# Altium PCB Leningrad_modify.PcbDoc (part 3 of 4)
Units mil, origin at the board's own origin, x right, y up, seen from the top; angles counter-clockwise.
Board outline 10000 x 7310 mil, 2 copper layers (Top Layer, Bottom Layer); 250 components, 267 nets, 1381 pads, 472 vias.
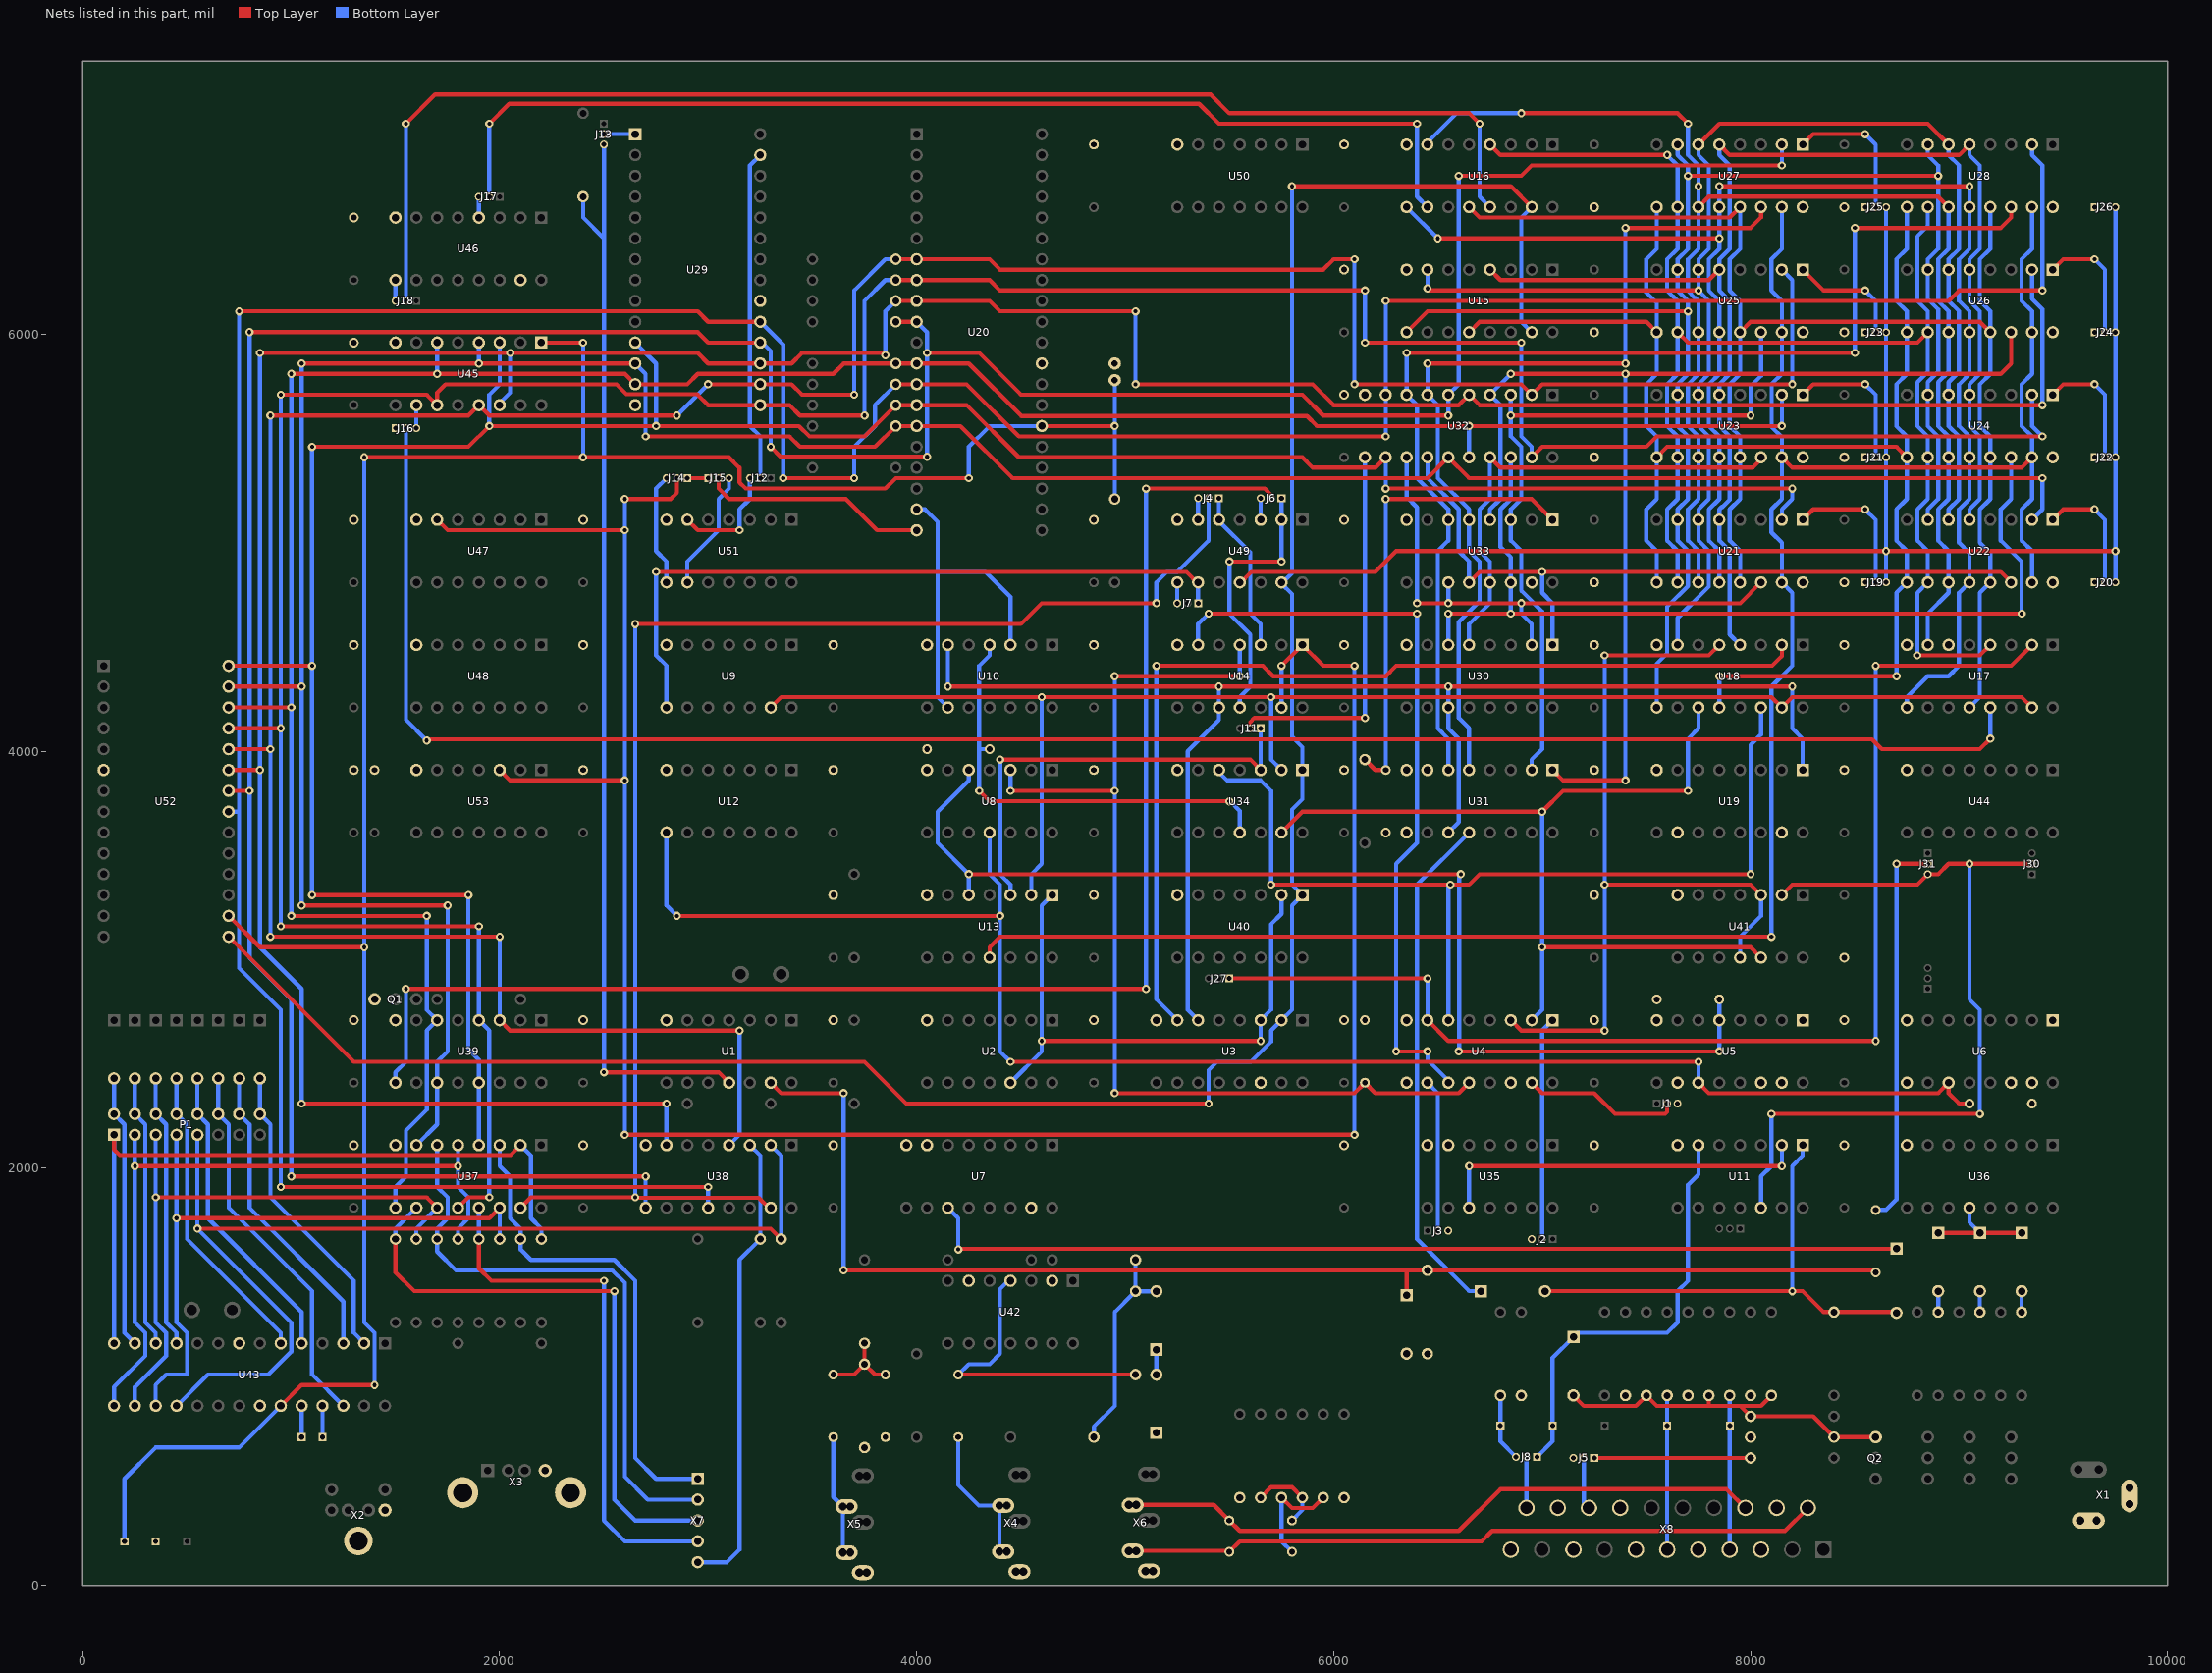
[diagram p2: the nets of this part, all layers, seen from the top]

## Via types
v1: diameter 39.37, hole 19.68, Top Layer to Bottom Layer, tented both sides, 472 vias

## Nets (pads, with @x,y where several pads share a name; then routed paths per layer and width w, separated by ;. In a path a pad name is that pad's centre, name@x,y a point inside that pad or via, vN(x,y) a via of type N, cw(c..) or ccw(c..) an arc to the next point about the centre after c; other vN are vias at no path point) (continued)
C\A\S\: U13.11 U21.15 U22.15 U23.15 U24.15 U25.15 U26.15 U27.15 U28.15 | length 10671.4
  Top Layer w20: U13.11@4350,3010 4350,3060 4400,3110 v1(8100,3110) ; U23.15@8150,5410 8200,5360 9300,5360 U24.15@9350,5410
  Bottom Layer w20: v1(8100,3110) 8100,4310 8200,4410 8200,4760 U21.15@8150,4810 8150,5000 8100,5050 8100,5160 8150,5210 U23.15@8150,5410 8150,5506.71 8101.71,5555 8101.71,5761.71 8150,5810 U25.15@8150,6010 8150,6160 8100,6210 8100,6360 8150,6410 U27.15@8150,6610 ; U22.15@9350,4810 9350,4960 9300,5010 9300,5160 9350,5210 U24.15@9350,5410 9350,5510 9300,5560 9300,5760 9350,5810 U26.15@9350,6010 9350,6110 9300,6160 9300,6360 9350,6410 U28.15@9350,6610
D0: R34.1 U20.14 U21.2 U29.11 U32.12 U37.4 U39.13 U45.3 U52.28 | length 13072.8
  Top Layer w20: U52.28@700,4410 v1(1100,4410) ; v1(1100,3310) v1(1850,3310) ; v1(1100,5460) 1850,5460 v1(1950,5560) v1(2750,5560) 3435.57,5560 3485.57,5510 3750,5510 R34.1@3900,5660 U20.14@4000,5660 4240,5660 4490,5410 5850,5410 5900,5360 6200,5360 U32.12@6250,5410 ; v1(6250,5260) v1(8200,5260)
  Bottom Layer w20: v1(1100,3310) v1(1100,4410) v1(1100,5460) ; v1(1850,3310) 1850,2570 1900,2520 U39.13@1900,2410 U37.4@1900,2110 ; v1(1950,5560) 1950,5710 2000,5760 U45.3@2000,5960 ; U29.11@2650,5960 2750,5860 v1(2750,5560) ; v1(6250,5260) U32.12@6250,5410 ; U21.2@8150,5110 8150,5160 8200,5210 v1(8200,5260)
D1: R35.1 U20.15 U22.2 U29.12 U32.15 U37.7 U39.11 U45.4 U52.27 | length 14102.1
  Top Layer w20: U52.27@700,4310 v1(1050,4310) ; v1(1050,3260) v1(1750,3260) ; v1(1050,5860) v1(1900,5860) U29.12@2650,5860 ; v1(2700,5510) 3390,5510 3440,5460 3800,5460 R35.1@3900,5560 U20.15@4000,5560 4210,5560 4460,5310 6450,5310 U32.15@6550,5410 6650,5310 v1(9400,5310)
  Bottom Layer w20: v1(1050,3260) v1(1050,4310) v1(1050,5860) ; U37.7@1600,2110 1700,2210 U39.11@1700,2410 1700,2510 1750,2560 v1(1750,3260) ; v1(1900,5860) U45.4@1900,5960 ; U29.12@2650,5860 2700,5810 v1(2700,5510) ; U22.2@9350,5110 9400,5160 v1(9400,5310)
D2: R37.1 U20.12 U23.2 U29.13 U32.16 U37.9 U39.6 U45.6 U52.26 | length 12839.9
  Top Layer w20: U52.26@700,4210 v1(1000,4210) ; v1(1000,3210) v1(1650,3210) ; v1(1000,5810) v1(1700,5810) 2600,5810 U29.13@2650,5760 2900,5760 2950,5810 3600,5810 3650,5860 R37.1@3900,5860 U20.12@4000,5860 4250,5860 4502.47,5607.53 5872.47,5607.53 5920,5560 v1(6650,5560) v1(8150,5560)
  Bottom Layer w20: v1(1000,3210) v1(1000,4210) v1(1000,5810) ; U37.9@1500,1810 1500,1910 1550,1960 1550,2180 1650,2280 1650,2660 U39.6@1700,2710 1650,2760 v1(1650,3210) ; v1(1700,5810) U45.6@1700,5960 ; U32.16@6650,5410 v1(6650,5560) ; v1(8150,5560) U23.2@8150,5710
D3: R39.1 U20.8 U24.2 U29.15 U32.19 U37.12 U39.4 U45.11 U52.25 | length 15495.8
  Top Layer w20: U52.25@700,4110 v1(950,4110) ; v1(950,3160) v1(1900,3160) ; v1(950,5710) 1650,5710 U45.11@1700,5660 1700,5720 1740,5760 2560,5760 2607.53,5712.47 2947.53,5712.47 3000,5660 U29.15@3250,5660 3390,5660 3440,5610 v1(3750,5610) ; U37.12@1800,1810 1850,1860 v1(1950,1860) ; R39.1@3900,6260 U20.8@4000,6260 4350,6260 4400,6210 v1(6150,6210) ; v1(6150,5960) v1(6900,5960) ; U32.19@6950,5410 7000,5460 7500,5460 7550,5510 v1(9400,5510)
  Bottom Layer w20: v1(950,3160) v1(950,4110) v1(950,5710) ; v1(1900,3160) U39.4@1900,2710 1950,2660 v1(1950,1860) ; v1(3750,5610) 3750,6160 3850,6260 R39.1@3900,6260 ; v1(6150,5960) v1(6150,6210) ; v1(6900,5960) 6900,5510 6950,5460 U32.19@6950,5410 ; U24.2@9350,5710 9350,5560 v1(9400,5510)
D4: R41.1 U20.7 U25.2 U29.16 U32.2 U38.4 U39.3 U45.13 U52.24 | length 15181.4
  Top Layer w20: U52.24@700,4010 v1(900,4010) ; v1(900,3110) v1(2000,3110) ; v1(900,5610) 1850,5610 U45.13@1900,5660 1950,5610 v1(2850,5610) ; U39.3@2000,2710 2050,2660 v1(3150,2660) ; v1(3000,5760) U29.16@3250,5760 3400,5760 3450,5710 v1(3700,5710) ; R41.1@3900,6360 U20.7@4000,6360 4350,6360 4400,6310 5950,6310 6000,6360 v1(6100,6360) ; v1(6100,5760) 6900,5760 U32.2@6950,5710 7000,5760 v1(8200,5760)
  Bottom Layer w20: v1(900,3110) v1(900,4010) v1(900,5610) ; U39.3@2000,2710 v1(2000,3110) ; v1(2850,5610) v1(3000,5760) ; U38.4@3100,2110 3150,2160 v1(3150,2660) ; v1(3700,5710) 3700,6210 3850,6360 R41.1@3900,6360 ; v1(6100,5760) v1(6100,6360) ; U25.2@8150,6310 8200,6260 v1(8200,5760)
D5: R43.1 U20.9 U26.2 U29.17 U32.5 U38.7 U45.14 U52.23 | length 16004.1
  Top Layer w20: U52.23@700,3910 v1(850,3910) ; v1(850,5910) v1(2050,5910) 2950,5910 3000,5860 U29.17@3250,5860 3400,5860 3450,5910 3840,5910 v1(3850,5900) ; v1(1050,2310) v1(2800,2310) ; R43.1@3900,6160 U20.9@4000,6160 4350,6160 4400,6110 v1(5050,6110) ; v1(5050,5760) 5900,5760 6000,5660 6600,5660 U32.5@6650,5710 6700,5660 v1(9400,5660)
  Bottom Layer w20: v1(850,5910) v1(850,3910) 850,3060 1050,2860 v1(1050,2310) ; U45.14@2000,5660 2000,5670 2050,5720 v1(2050,5910) ; U38.7@2800,2110 v1(2800,2310) ; v1(3850,5900) 3850,6110 R43.1@3900,6160 ; v1(5050,5760) v1(5050,6110) ; U26.2@9350,6310 9350,6170 9400,6120 v1(9400,5660)
D6: R47.1 U20.10 U27.2 U29.18 U32.6 U38.9 U52.22 | length 16083.7
  Top Layer w20: U52.22@700,3810 v1(800,3810) ; v1(800,6010) 2950,6010 3000,5960 U29.18@3250,5960 ; v1(1000,1960) v1(2700,1960) ; v1(3300,5460) 3347.53,5412.47 v1(4050,5412.47) ; R47.1@3900,6060 U20.10@4000,6060 ; v1(4050,5910) 4300,5910 4500,5710 5850,5710 5950,5610 v1(6550,5610) ; v1(6600,6760) 6900,6760 6950,6810 v1(8150,6810)
  Bottom Layer w20: v1(800,6010) v1(800,3810) 800,3010 1000,2810 v1(1000,1960) ; U38.9@2700,1810 v1(2700,1960) ; U29.18@3250,5960 3260,5960 3300,5920 v1(3300,5460) ; U20.10@4000,6060 4050,6010 v1(4050,5910) v1(4050,5412.47) ; v1(6550,5610) U32.6@6550,5710 6600,5760 v1(6600,6760) ; v1(8150,6810) U27.2@8150,6910
D7: R48.1 U20.13 U28.2 U29.19 U32.9 U38.12 U52.21 | length 17666.9
  Top Layer w20: v1(750,6110) 2950,6110 3000,6060 U29.19@3250,6060 ; v1(950,1910) v1(3000,1910) ; v1(3360,5310) v1(3700,5310) ; R48.1@3900,5760 U20.13@4000,5760 4240,5760 4490,5510 v1(6250,5510) ; v1(6250,6160) 8950,6160 9000,6210 v1(9400,6210)
  Bottom Layer w20: U52.21@700,3710 750,3710 ; v1(750,6110) 750,3710 ; v1(950,1910) 950,2760 750,2960 750,3710 ; U38.12@3000,1810 v1(3000,1910) ; U29.19@3250,6060 3360,5950 v1(3360,5310) ; v1(3700,5310) 3700,5460 3800,5560 3800,5660 R48.1@3900,5760 ; v1(6250,5510) U32.9@6250,5710 v1(6250,6160) ; U28.2@9350,6910 9350,6860 9400,6810 v1(9400,6210)
DV0: R36.1 U37.3 X7.1 | length 2345
  Bottom Layer w20: U37.3@2000,2110 2000,2010 2050,1960 2050,1760 2100,1710 2100,1610 2150,1560 2550,1560 2650,1460 2650,610 2750,510 X7.1@2950,510
DV1: R38.1 U37.6 X7.2 | length 2839.1
  Bottom Layer w20: U37.6@1700,2110 1700,1910 1750,1860 1750,1760 1700,1710 1700,1600 1790,1510 2540,1510 2600,1450 2600,520 2710,410 X7.2@2950,410
DV2: R40.1 U37.10 X7.3 | length 2880.1
  Top Layer w20: R40.1@1500,1660 1500,1500 1590,1410 v1(2550,1410)
  Bottom Layer w20: R40.1@1500,1660 1500,1710 U37.10@1600,1810 ; v1(2550,1410) 2550,410 2650,310 X7.3@2950,310
DV3: R42.1 U37.13 X7.4 | length 2570.4
  Top Layer w20: R42.1@1900,1660 1900,1520 1960,1460 v1(2500,1460)
  Bottom Layer w20: R42.1@1900,1660 U37.13@1900,1810 ; v1(2500,1460) 2500,310 2600,210 X7.4@2940,210 ; X7.4@2950,210 X7.4@2940,210 ; X7.4@2950,220 X7.4@2940,210
DV4: R44.1 U38.3 X7.5 | length 2231.1
  Bottom Layer w20: X7.5@2950,120 2960,110 3090,110 3150,170 3150,1560 R44.1@3250,1660 3250,2060 U38.3@3200,2110
GND: C1.2 C3.1 C4.1 C5.1 C6.1 C7.1 C8.1 C9.1 C10.1 C11.2 C12.1 C13.1 C14.1 C15.1 C16.1 C17.1 C18.1 C19.1 C20.1 C21.1 C22.2 C23.1 C25.2 C26.2 C27.2 C28.1 C29.1 C30.1 C31.1 C32.1 C33.1 C34.1 C35.1 C36.1 C37.1 C38.1 C39.1 C40.1 C41.1 C42.1 C43.1 C44.1 C45.1 C47.1 C48.1 C49.1 C50.2 C51.1 C54.1 C55.1 C56.1 C57.1 C58.1 C59.1 C60.1 C61.1 C62.1 D1.1 D9.2 J1.3 J2.3 J3.3 J5.3 J16.1 J19.1 J20.1 J21.1 J22.1 J23.1 J24.1 J25.1 J26.1 Q1.1 R15.1 R19.1 R20.1 R21.1 R22.1 R23.1 R32.1 R57.2 R62.1 RESET_BTN2.1 U1.7 U2.7 U3.8 U3.14 U4.8 U4.9 U4.14 U5.1 U5.8 U5.10 U5.14 U5.15 U6.1 U6.8 U6.9 U6.14 U6.15 U7.7 U7.8 U7.15 U8.7 U9.7 U10.7 U11.7 U12.7 U13.7 U14.7 U15.8 U16.8 U17.6 U17.8 U18.8 U19.8 U19.10 U19.15 U20.29 U21.16 U22.16 U23.16 U24.16 U25.16 U26.16 U27.16 U28.16 U29.14 U29.20 U30.8 U31.7 U31.8 U31.9 U32.10 U33.8 U33.15 U34.7 U35.6 U35.7 U36.8 U37.8 U38.8 U39.8 U40.7 U41.7 U42.2 U42.6 U43.8 U43.22 U44.8 U45.8 U46.8 U46.15 U47.7 U48.7 U49.7 U50.7 U51.7 U52.6 U53.7 X1.2 X1.2A X1.2B X1.3 X1.3A X1.3B X2.3 X2.S X3.4 X3.5 X3.6 X4.1 X4.1A X4.1B X5.1 X5.1A X5.1B X6.1 X6.1A X6.1B X8.4 X8.5 X8.9 X8.13 X8.14 X8.17 X8.18 X8.21 | length 0.2
  Top Layer w20: R22.1@7700,909.76 R22.1@7700,910
H0: U2.12 U3.3 U13.1 U40.2 | length 2774.3
  Top Layer w20: v1(4600,2610) v1(5650,2610)
  Bottom Layer w20: U2.12@4450,2410 4600,2560 v1(4600,2610) 4600,3260 U13.1@4650,3310 ; v1(5650,2610) U3.3@5650,2710 5700,2760 5700,3170 5750,3220 U40.2@5750,3310
H1: U3.2 U15.15 U16.15 U34.1 U40.1 U49.13 U52.15 | length 11655.7
  Top Layer w20: U52.15@700,3110 1300,2510 3750,2510 3950,2310 v1(5400,2310) ; U49.13@5750,4804.09 U49.13@5750,4810 ; v1(5800,6710) 6850,6710 U16.15@6950,6610
  Bottom Layer w20: v1(5400,2310) 5400,2470 5440,2510 5603.29,2510 5700,2606.71 5700,2660 U3.2@5750,2710 5800,2760 5800,3260 U40.1@5850,3310 5800,3360 5800,3720 5850,3770 U34.1@5850,3910 5850,4020 5800,4070 5800,4754.09 5750,4804.09 5800,4854.09 v1(5800,6710) ; U15.15@6950,6010 6900,6060 6900,6560 U16.15@6950,6610
H2: U3.6 U10.6 U14.10 U19.1 U30.11 U31.11 | length 7123.3
  Top Layer w20: v1(4150,4310) v1(5450,4310) v1(6550,4310) v1(8200,4310)
  Bottom Layer w20: v1(4150,4310) U10.6@4150,4510 ; U3.6@5350,2710 5300,2760 5300,4000 5450,4150 U14.10@5450,4210 v1(5450,4310) ; U31.11@6550,3610 6600,3660 6600,4060 6550,4110 U30.11@6550,4210 v1(6550,4310) ; v1(8200,4310) 8200,4110 8250,4060 U19.1@8250,3910 U19.1@8270,3890
H3: U3.7 U18.2 | length 4855.5
  Top Layer w20: v1(5150,4410) 5660,4410 5710,4360 6250,4360 6300,4410 8103.29,4410 8150,4456.71 U18.2@8150,4510
  Bottom Layer w20: v1(5150,4410) 5150,2810 U3.7@5250,2710
H4: U4.3 U18.5 U41.3 U41.11 | length 3953.6
  Top Layer w20: U4.3@6850,2710 6900,2660 v1(7300,2660) ; v1(7300,3360) 8000,3360 U41.3@8050,3310 ; v1(7300,4460) 7800,4460 U18.5@7850,4510
  Bottom Layer w20: v1(7300,2660) v1(7300,3360) v1(7300,4460) ; U41.11@7950,3010 7950,3110 8050,3210 U41.3@8050,3310
H5: U4.2 U18.11 U34.13 U41.12 | length 4545
  Top Layer w20: U34.13@5750,3610 5850,3710 v1(7000,3710) 7100,3810 v1(7700,3810) ; v1(7000,3060) 8000,3060 U41.12@8050,3010
  Bottom Layer w20: U4.2@6950,2710 7000,2760 v1(7000,3060) v1(7000,3710) ; v1(7700,3810) 7700,4060 7750,4110 U18.11@7750,4210
H6: U4.6 U18.14 U34.5 | length 4542.8
  Top Layer w20: v1(5700,3360) v1(6560,3360) 6650,3360 6700,3410 v1(8000,3410)
  Bottom Layer w20: U34.5@5450,3910 5450,3900 5490,3860 5650,3860 5700,3810 v1(5700,3360) ; U4.6@6550,2710 6550,3350 v1(6560,3360) ; v1(8000,3410) 8000,4030 8050,4080 U18.14@8050,4210
H7: J27.1 U4.7 U17.2 | length 5932.8
  Top Layer w20: J27.1@5500,2910 v1(6450,2910) ; U4.7@6450,2710 6550,2610 v1(8600,2610) ; v1(8600,4410) 9250,4410 U17.2@9350,4510
  Bottom Layer w20: U4.7@6450,2710 v1(6450,2910) ; v1(8600,2610) v1(8600,4410)
H\1\: U9.13 U13.2 U17.15 U18.15 U34.2 | length 7474.3
  Top Layer w20: U9.13@3300,4210 3350,4260 v1(4600,4260) v1(5700,4260) 8100,4260 U18.15@8150,4210 8200,4260 9300,4260 U17.15@9350,4210
  Bottom Layer w20: U13.2@4550,3310 4550,3410 4600,3460 v1(4600,4260) ; v1(5700,4260) 5700,3960 U34.2@5750,3910
H\C\O\: C10.2 U4.12 U8.3 U14.4 | length 5112.1
  Top Layer w20: v1(4450,3810) v1(4950,3810) ; v1(4950,2360) 6100,2360 C10.2@6150,2410 6200,2360 6600,2360 U4.12@6650,2410 ; v1(4950,4360) v1(5550,4360)
  Bottom Layer w20: v1(4450,3810) U8.3@4450,3910 ; v1(4950,2360) v1(4950,3810) v1(4950,4360) ; v1(5550,4360) U14.4@5550,4510
I\O\R\D\: J4.2 U37.15 U38.15 | length 7158.8
  Top Layer w20: U37.15@2100,1810 2150,1860 v1(2650,1860) ; v1@2650,1857.53 3242.47,1857.53 3290,1810 U38.15@3300,1810 ; v1(2650,4610) 4500,4610 4600,4710 v1(5150,4710)
  Bottom Layer w20: v1(2650,1860) v1(2650,4610) ; v1(5150,4710) 5150,4810 5200,4860 5250,4860 5400,5010 J4.2@5400,5204.09
INFV: U11.2 U35.10 | length 1800
  Top Layer w20: v1(6650,2010) v1(8150,2010)
  Bottom Layer w20: U35.10@6650,1810 v1(6650,2010) ; v1(8150,2010) U11.2@8150,2110
K\S\: J30.2 J31.3 U11.12 U41.2 | length 3953.6
  Top Layer w20: v1(8100,2260) v1(9100,2260) ; U41.2@8150,3310 8200,3360 8800,3360 J31.3@8850,3410 8900,3410 8950,3460 v1(9050,3460) J30.2@9350,3460
  Bottom Layer w20: U11.12@8050,1810 8050,1960 8100,2010 v1(8100,2260) ; v1(9050,3460) 9050,2810 9100,2760 v1(9100,2260)
KL0: P1.1 R27.1 U37.2 U43.14 | length 3542.5
  Top Layer w20: P1.1@150,2160 150,2090 177.53,2062.47 2052.47,2062.47 U37.2@2100,2110
  Bottom Layer w20: U43.14@150,1160 P1.1@150,2160 ; U37.2@2100,2110 2150,2060 2150,1760 2200,1710 R27.1@2200,1660
KL1: P1.3 R28.1 U37.5 U43.15 | length 3414.3
  Top Layer w20: v1(250,2010) v1(1800,2010)
  Bottom Layer w20: U43.15@150,870 150,950 300,1100 300,1210 250,1260 v1(250,2010) P1.3@250,2160 ; R28.1@1800,1660 1800,1710 1850,1760 1850,1860 1800,1910 v1(1800,2010) U37.5@1800,2110
KL2: P1.5 R29.1 U37.11 U43.16 | length 2945
  Top Layer w20: U43.16@240,870 U43.16@250,870 ; v1(350,1860) 1650,1860 U37.11@1700,1810
  Bottom Layer w20: U43.16@250,870 250,950 400,1100 400,1210 350,1260 v1(350,1860) P1.5@350,2160 ; R29.1@1600,1660 1600,1710 U37.11@1700,1810
KL3: P1.7 R30.1 U37.14 U43.17 | length 3172.1
  Top Layer w20: v1(450,1760) 1950,1760 U37.14@2000,1810
  Bottom Layer w20: U43.17@350,850 U43.17@350,860 350,960 400,1010 500,1010 500,1210 450,1260 v1(450,1760) P1.7@450,2160 ; R30.1@2000,1660 U37.14@2000,1810
KL4: P1.9 R33.1 U38.2 U43.18 | length 5175.5
  Top Layer w20: v1(550,1710) 3300,1710 R33.1@3350,1660
  Bottom Layer w20: U43.18@450,860 600,1010 890,1010 1000,1120 1000,1260 v1(550,1710) P1.9@550,2160 ; U38.2@3300,2110 3350,2060 R33.1@3350,1660
L\D\H\: U4.11 U14.6 | length 3653.6
  Top Layer w20: v1(5400,4660) v1(6400,4660) ; v1(6300,2560) v1(6450,2560)
  Bottom Layer w20: U14.6@5350,4510 5350,4610 v1(5400,4660) ; v1(6300,2560) 6300,3460 6400,3560 v1(6400,4660) ; v1(6450,2560) 6450,2520 6550,2420 U4.11@6550,2410
L\D\V\: C11.1 U5.11 U6.11 U8.11 U12.8 | length 7924.3
  Top Layer w20: v1(2850,3210) v1(4400,3210) ; v1(4450,2510) v1(7750,2510) ; U5.11@7750,2410 7800,2360 8900,2360 U6.11@8950,2410 8950,2360 9000,2310 C11.1@9050,2310
  Bottom Layer w20: U12.8@2800,3610 2800,3260 v1(2850,3210) ; U8.11@4350,3610 4350,3410 4400,3360 v1(4400,3210) 4400,2560 v1(4450,2510) ; U5.11@7750,2410 v1(7750,2510)
M\R\E\Q\: U10.3 U10.9 U20.19 | length 1665.3
  Bottom Layer w20: U20.19@4000,5160 4040,5160 4100,5100 4100,4860 ; U10.9@4150,4210 4100,4260 4100,4860 ; U10.3@4450,4510 4450,4740 4330,4860 4100,4860
MA0: U15.4 U18.4 U21.5 U22.5 U23.5 U24.5 U25.5 U26.5 U27.5 U28.5 | length 6874.7
  Top Layer w20: U15.4@6750,6310 6800,6260 7800,6260 U25.5@7850,6310 ; U27.5@7850,6910 7900,6860 9000,6860 U28.5@9050,6910
  Bottom Layer w20: U27.5@7850,6910 7850,6860 7900,6810 7900,6410 7850,6360 U25.5@7850,6310 7850,6210 7900,6160 7900,5810 7850,5760 U23.5@7850,5710 7850,5560 7900,5510 7900,5206.71 7865.61,5172.31 7862.31,5172.31 7850,5160 U21.5@7850,5110 7850,5010 7900,4960 7900,4560 U18.4@7950,4510 ; U22.5@9050,5110 9050,5160 9100,5210 9100,5510 9050,5560 U24.5@9050,5710 9050,5760 9100,5810 9100,6110 9050,6160 U26.5@9050,6310 9050,6360 9100,6410 9100,6810 9050,6860 U28.5@9050,6910
MA1: U15.7 U18.7 U21.6 U22.6 U23.6 U24.6 U25.6 U26.6 U27.6 U28.6 | length 7214.2
  Top Layer w20: v1(6450,6220) 6450,6210 v1(7750,6210) ; U27.6@7750,6910 7850,7010 8850,7010 U28.6@8950,6910
  Bottom Layer w20: v1(6450,6220) U15.7@6450,6310 ; U18.7@7650,4510 7650,4640 7800,4790 7800,4960 7750,5010 U21.6@7750,5110 7750,5160 7800,5210 7800,5510 7750,5560 U23.6@7750,5710 7750,5760 7800,5810 7800,6160 v1(7750,6210) U25.6@7750,6310 7750,6360 7800,6410 7800,6810 7750,6860 U27.6@7750,6910 ; U22.6@8950,5110 8950,5160 9000,5210 9000,5510 8950,5560 U24.6@8950,5710 8950,5770 9000,5820 9000,6110 8950,6160 U26.6@8950,6310 8950,6360 9000,6410 9000,6810 8950,6860 U28.6@8950,6910
MA2: U15.9 U18.9 U21.7 U22.7 U23.7 U24.7 U25.7 U26.7 U27.7 U28.7 | length 7422.8
  Top Layer w20: U15.9@6350,6010 6450,6110 v1(7700,6110) ; v1(7700,6760) v1(8900,6760)
  Bottom Layer w20: U18.9@7550,4210 7550,4420 7600,4470 7600,4692.79 7700,4792.79 7700,4960 7650,5010 U21.7@7650,5110 7650,5160 7700,5210 7700,5510 7650,5560 U23.7@7650,5710 7650,5760 7700,5810 v1(7700,6110) 7700,6160 7650,6210 U25.7@7650,6310 7650,6360 7700,6410 v1(7700,6760) 7700,6810 7650,6860 U27.7@7650,6910 ; U22.7@8850,5110 8850,5160 8900,5210 8900,5510 8850,5560 U24.7@8850,5710 8850,5770 8900,5820 8900,6120 8850,6170 U26.7@8850,6310 8850,6360 8900,6410 v1(8900,6760) 8900,6810 8850,6860 U28.7@8850,6910
MA3: U15.12 U18.12 U21.9 U22.9 U23.9 U24.9 U25.9 U26.9 U27.9 U28.9 | length 7482.1
  Top Layer w20: U15.12@6650,6010 6700,6060 7500,6060 U25.9@7550,6010 ; U23.9@7550,5410 7600,5460 8700,5460 U24.9@8750,5410 ; v1(7850,4360) 8680,4360
  Bottom Layer w20: U21.9@7550,4810 7550,4960 7500,5010 7500,5160 7550,5210 U23.9@7550,5410 7550,5510 7500,5560 7500,5760 7550,5810 U25.9@7550,6010 7550,6150 7500,6200 7500,6360 7550,6410 U27.9@7550,6610 ; U18.12@7850,4210 v1(7850,4360) ; v1(8700,4360) 8700,4760 U22.9@8750,4810 8750,4960 8700,5010 8700,5160 8750,5210 U24.9@8750,5410 8750,5510 8700,5560 8700,5760 8750,5810 U26.9@8750,6010 8750,6110 8700,6160 8700,6360 8750,6410 U28.9@8750,6610
MA4: U16.4 U17.4 U21.10 U22.10 U23.10 U24.10 U25.10 U26.10 U27.10 U28.10 | length 6972.8
  Top Layer w20: U16.4@6750,6910 6800,6860 v1(7600,6860) ; U25.10@7650,6010 7700,5960 8800,5960 U26.10@8850,6010 ; v1(8800,4460) 9100,4460 U17.4@9150,4510
  Bottom Layer w20: v1(7600,6860) 7650,6810 U27.10@7650,6610 7650,6410 7600,6360 7600,6210 7650,6160 U25.10@7650,6010 7650,5810 7600,5760 7600,5560 7650,5510 U23.10@7650,5410 7650,5210 7600,5160 7600,5010 7650,4960 U21.10@7650,4810 ; v1(8800,4460) 8800,4760 U22.10@8850,4810 8850,4960 8800,5010 8800,5160 8850,5210 U24.10@8850,5410 8850,5510 8800,5560 8800,5770 8850,5820 U26.10@8850,6010 8850,6110 8800,6160 8800,6470 8850,6520 U28.10@8850,6610
MA5: U16.7 U17.7 U21.11 U22.11 U23.11 U24.11 U25.11 U26.11 U27.11 U28.11 | length 7192.7
  Top Layer w20: v1(6900,7060) 7650,7060 v1(7700,7010) ; U27.11@7750,6610 7800,6660 8900,6660 U28.11@8950,6610
  Bottom Layer w20: U16.7@6450,6910 6450,6920 6590,7060 v1(6900,7060) ; v1(7700,7010) 7700,6860 7750,6810 v1(7750,6710) U27.11@7750,6610 7750,6410 7700,6360 7700,6206.71 7734.39,6172.31 7737.69,6172.31 7750,6160 U25.11@7750,6010 7750,5810 7700,5760 7700,5560 7750,5510 U23.11@7750,5410 7750,5210 7700,5160 7700,5010 7750,4960 U21.11@7750,4810 ; U17.7@8850,4510 8850,4660 8950,4760 U22.11@8950,4810 8950,4960 8900,5010 8900,5160 8950,5210 U24.11@8950,5410 8950,5510 8900,5560 8900,5770 8950,5820 U26.11@8950,6010 8950,6110 8900,6160 8900,6360 8950,6410 U28.11@8950,6610
MA6: U16.9 U17.9 U21.12 U22.12 U23.12 U24.12 U25.12 U26.12 U27.12 U28.12 | length 7593.5
  Top Layer w20: v1(6500,6460) v1(7850,6460) ; v1(7850,6710) v1(9050,6710)
  Bottom Layer w20: U16.9@6350,6610 v1(6500,6460) ; U21.12@7850,4810 7850,4960 7800,5010 7800,5160 7850,5210 U23.12@7850,5410 7850,5510 7800,5560 7800,5760 7850,5810 U25.12@7850,6010 7850,6160 7800,6210 7800,6360 7850,6410 v1(7850,6460) U27.12@7850,6610 v1(7850,6710) ; U17.9@8750,4210 8750,4260 8850,4360 8950,4360 9000,4410 9000,4760 U22.12@9050,4810 9050,4950 9000,5000 9000,5160 9050,5210 U24.12@9050,5410 9050,5510 9000,5560 9000,5760 9050,5810 U26.12@9050,6010 9050,6110 9000,6160 9000,6360 9050,6410 U28.12@9050,6610 v1(9050,6710)
MA7: U16.12 U17.12 U21.13 U22.13 U23.13 U24.13 U25.13 U26.13 U27.13 U28.13 | length 7072.8
  Top Layer w20: U16.12@6650,6610 6700,6560 7900,6560 U27.13@7950,6610 ; U25.13@7950,6010 8000,6060 9100,6060 U26.13@9150,6010
  Bottom Layer w20: U21.13@7950,4810 7950,4960 7900,5010 7900,5160 7950,5210 U23.13@7950,5410 7950,5510 7900,5560 7900,5760 7950,5810 U25.13@7950,6010 7950,6160 7900,6210 7900,6360 7950,6410 U27.13@7950,6610 ; U17.12@9050,4210 9100,4260 9100,4760 U22.13@9150,4810 9150,4950 9100,5000 9100,5160 9150,5210 U24.13@9150,5410 9150,5510 9100,5560 9100,5760 9150,5810 U26.13@9150,6010 9150,6110 9100,6160 9100,6360 9150,6410 U28.13@9150,6610
MA8: J19.3 J20.3 J21.3 J22.3 J23.3 J24.3 J25.3 J26.3 U49.11 | length 7864.6
  Top Layer w20: U49.11@5550,4804.09 5605.91,4860 6200,4860 6300,4960 v1(8650,4960) v1(9750,4960)
  Bottom Layer w20: J19.3@8650,4810 v1(8650,4960) J21.3@8650,5410 J23.3@8650,6010 J25.3@8650,6610 ; J20.3@9750,4810 v1(9750,4960) J22.3@9750,5410 J24.3@9750,6010 J26.3@9750,6610
MD0: U21.14 U30.2 U32.13 U33.11 | length 2732.6
  Top Layer w20: v1(6400,4710) v1(6550,4710) v1(6900,4710) 7950,4710 U21.14@8050,4810
  Bottom Layer w20: U32.13@6350,5410 6350,5220 6400,5170 v1(6400,4710) ; v1(6550,4710) U33.11@6550,4809.76 ; v1(6900,4710) 6900,4660 6950,4610 U30.2@6950,4510
MD1: U22.14 U30.1 U32.14 U33.12 | length 3695.3
  Top Layer w20: U33.12@6650,4809.76 6700.24,4860 v1(7000,4860) 9200,4860 U22.14@9250,4810
  Bottom Layer w20: U32.14@6450,5410 6450,5310 6600,5160 6600,4960 6650,4910 U33.12@6650,4809.76 ; v1(7000,4860) 7000,4760 7050,4710 U30.1@7050,4510
MD2: U23.14 U30.5 U32.17 U33.13 | length 2330.1
  Top Layer w20: U32.17@6750,5410 6800,5360 8010,5360 8050,5400 U23.14@8050,5410
  Bottom Layer w20: U30.5@6650,4510 6650,4610 6750,4710 U33.13@6750,4809.76 6750,4910 6700,4960 6700,5160 6750,5210 U32.17@6750,5410
MD3: U24.14 U30.6 U32.18 U33.14 | length 4503.6
  Top Layer w20: v1(6550,4660) v1(6850,4660) v1(9300,4660)
  Bottom Layer w20: U30.6@6550,4510 v1(6550,4660) ; v1(6850,4660) U33.14@6850,4809.76 6850,4930 6800,4980 6800,5160 6850,5210 U32.18@6850,5410 ; U24.14@9250,5410 9250,5210 9200,5160 9200,5010 9300,4910 v1(9300,4660)
MD4: U25.14 U31.2 U32.3 U33.3 | length 3495
  Top Layer w20: v1(6850,5610) v1(8000,5610)
  Bottom Layer w20: U32.3@6850,5710 v1(6850,5610) 6850,5510 6900,5460 6900,5210 6850,5160 U33.3@6850,5109.76 6850,5010 6900,4960 6900,4770 7000,4670 7000,4010 6950,3960 U31.2@6950,3910 ; v1(8000,5610) 8000,5750 8050,5800 U25.14@8050,6010
MD5: U26.14 U31.1 U32.4 U33.4 | length 5674.5
  Top Layer w20: v1(6850,5810) v1(7400,5810) 9200,5810 9250,5860 U26.14@9250,6010 ; U31.1@7050,3910 7100,3860 v1(7400,3860)
  Bottom Layer w20: U33.4@6750,5109.76 6750,5160 6800,5210 6800,5660 U32.4@6750,5710 v1(6850,5810) ; v1(7400,3860) v1(7400,5810)
MD6: U27.14 U31.5 U32.7 U33.5 | length 4436.4
  Top Layer w20: v1(6450,5860) v1(7400,5860) ; v1(7400,6510) 8000,6510 8050,6560 U27.14@8050,6610
  Bottom Layer w20: v1(6450,5860) U32.7@6450,5710 6500,5660 6500,5310 6650,5160 U33.5@6650,5109.76 6650,4960 6700,4910 6700,4720 6600,4620 6600,4160 6650,4110 U31.5@6650,3910 ; v1(7400,5860) v1(7400,6510)
MD7: U28.14 U31.6 U32.8 U33.6 | length 5695
  Top Layer w20: v1(6350,5910) v1(8500,5910) ; v1(8500,6510) 9200,6510 9250,6560 U28.14@9250,6610
  Bottom Layer w20: v1(6350,5910) U32.8@6350,5710 6400,5660 6400,5310 6550,5160 U33.6@6550,5109.76 6550,5010 6500,4960 6500,4110 6550,4060 U31.6@6550,3910 ; v1(8500,5910) v1(8500,6510)
NetB_1: B.1 R10.2 X8.7 | length 739.8
  Bottom Layer w20: X8.7@7900,170 B.1@7900,765 R10.2@7900,909.76
NetBTN1_1: BTN1.1 U43.24 | length 150
  Bottom Layer w20: BTN1.1@1050,710 U43.24@1050,860
NetBTN2_1: BTN2.1 U43.25 | length 150
  Bottom Layer w20: BTN2.1@1150,710 U43.25@1150,860
NetC1_1: C1.1 R5.2 RST.1 U20.26 U43.23 U45.1 U52.16 | length 12104.5
  Top Layer w20: U52.16@700,3210 850,3060 v1(1350,3060) ; U43.23@950,860 1050,960 v1(1400,960) ; v1(1350,5410) v1(2400,5410) 3100,5410 3150,5360 3150,5290 3180,5260 3850,5260 3900,5310 v1(4250,5310) ; U45.1@2200,5960 v1(2400,5960) ; U20.26@4600,5560 v1(4950,5560)
  Bottom Layer w20: RST.1@200,210 200,510 350,660 750,660 U43.23@950,860 ; v1(1350,5410) v1(1350,3060) 1350,1260 1400,1210 v1(1400,960) ; v1(2400,5410) v1(2400,5960) ; v1(4250,5310) 4250,5460 4350,5560 U20.26@4600,5560 ; R5.2@4950,5210 v1(4950,5560) C1.1@4950,5780
NetC2_1: C2.1 J31.2 | length 1884.9
  Top Layer w20: v1(8700,3460) J31.2@8850,3460
  Bottom Layer w20: C2.1@8600,1810 8610,1800 8650,1800 8700,1850 v1(8700,3460)
NetC2_2: C2.2 D1.2 R23.2 U1.13 | length 6290.7
  Top Layer w20: U1.13@3300,2410 3350,2360 v1(3650,2360) ; v1(3650,1510) 6350,1510 ; D1.2@6350,1390 6350,1510 ; C2.2@8600,1510 R23.2@6450,1510 6350,1510
  Bottom Layer w20: v1(3650,1510) v1(3650,2360)
NetC12_2: C12.2 U5.5 U8.5 U13.5 | length 5438.4
  Top Layer w20: v1(4250,3410) v1(6610,3410) ; v1(6600,2560) v1(7850,2560)
  Bottom Layer w20: U13.5@4250,3310 v1(4250,3410) 4100,3560 4100,3710 4250,3860 U8.5@4250,3910 ; v1(6600,2560) 6602.47,2562.47 6602.47,3402.47 v1(6610,3410) ; v1(7850,2560) U5.5@7850,2710 C12.2@7850,2810
NetC23_2: C23.2 C24.2 R31.2 R32.2 | length 391.4
  Top Layer w20: C24.2@3600,1010 3700,1010 R32.2@3750,1060 ; R31.2@3750,1160 R32.2@3750,1060 ; C23.2@3850,1010 3800,1010 R32.2@3750,1060
NetC24_1: C24.1 X5.2 X5.2A X5.2B X5.4 X5.4A X5.4B | length 587.2
  Bottom Layer w20: C24.1@3600,710 3600,422.76 X5.4B@3645.83,376.93 ; X5.2B@3645.83,156.46 3645.83,341.5 X5.4A@3681.26,376.93
NetC45_2: C45.2 U10.4 U34.11 | length 2164.1
  Top Layer w20: v1(4300,3810) 4350,3760 v1(5500,3760)
  Bottom Layer w20: v1(4300,3810) 4300,4010 ; C45.2@4350,4010 4300,4010 ; U10.4@4350,4510 4350,4460 4300,4410 4300,4010 ; v1(5500,3760) 5503.29,3760 5550,3713.29 U34.11@5550,3610
NetC46_1: C46.1 X4.2 X4.2A X4.2B X4.4 X4.4A X4.4B | length 688.2
  Bottom Layer w20: C46.1@4200,710 4200,480 4298.35,381.65 X4.4B@4397.01,381.65 X4.2B@4397.01,161.18
NetC46_2: C46.2 R49.1 U42.4 | length 1472.1
  Top Layer w20: C46.2@4200,1010 R49.1@5050,1010
  Bottom Layer w20: C46.2@4200,1010 4250,1060 4350,1060 4400,1110 4400,1420 U42.4@4450,1470
NetC50_1: C50.1 R25.1 U33.1 | length 2262.2
  Top Layer w20: R25.1@6150,3960 6200,3910 C50.1@6250,3910 ; v1(6250,5210) 6949.76,5210 U33.1@7050,5109.76
  Bottom Layer w20: C50.1@6250,3910 v1(6250,5210)
NetC52_1: C52.1 R58.2 R59.2 | length 372.1
  Top Layer w20: R58.2@5650,420 5700,470 5800,470 R59.2@5850,420
  Bottom Layer w20: C52.1@5800,310 5850,360 R59.2@5850,420
NetC52_2: C52.2 X6.4 X6.4A X6.4B X8.6 | length 3128.6
  Top Layer w20: X6.4B@5018.19,384.8 X6.4@5035.91,384.8 X6.4A@5053.62,384.8 5425.2,384.8 C52.2@5500,310 5550,260 6600,260 6800,460 7885,460 X8.6@7975,370
NetC53_1: C53.1 R60.1 R61.2 | length 522.1
  Top Layer w20: R60.1@5750,420 5800,370 5900,370 R61.2@5950,420
  Bottom Layer w20: R60.1@5750,420 5750,210 C53.1@5800,160
NetC53_2: C53.2 X6.2 X6.2A X6.2B X8.2 | length 3332.3
  Top Layer w20: X6.2B@5018.19,164.33 X6.2@5033.86,180 ; X6.2A@5053.62,164.33 5495.67,164.33 C53.2@5500,160 5550,210 6710,210 6760,260 8165,260 X8.2@8275,370
NetD2_1: D2.1 D3.1 R4.2 U11.1 | length 2453.6
  Top Layer w20: D3.1@7013.54,1410 v1(8200,1410) 8250,1410 8350,1310 R4.2@8400,1310 8696.46,1310 D2.1@8700,1306.46
  Bottom Layer w20: v1(8200,1410) 8200,2010 8250,2060 U11.1@8250,2110 ; R4.2@8400,1310 R4.2@8403.54,1310
NetD2_2: D2.2 U7.11 | length 4722.2
  Top Layer w20: v1(4200,1610) 4203.54,1613.54 D2.2@8700,1613.54
  Bottom Layer w20: U7.11@4150,1810 4200,1760 v1(4200,1610)
NetD3_2: D3.2 U31.12 | length 2463.6
  Bottom Layer w20: U31.12@6650,3610 6400,3360 6400,1660 6650,1410 D3.2@6706.46,1410
NetD4_1: D4.1 Q2.3 R14.1 R15.2 R16.2 R17.2 R18.2 | length 1794.7
  Top Layer w20: D4.1@7150,910 7200,860 7450.24,860 R17.2@7500,909.76 7500.24,909.76 7550,860 7800.12,860 ; R16.2@7800,909.76 7800,860.12 7800.12,860 ; R14.1@8000,809.76 8300,809.76 R15.2@8400,709.76 Q2.3@8600,709.76 ; R14.1@8000,810 7950,860 ; R18.2@8100,909.76 8050.24,860 7950,860 ; 8200,809.76 8200,810 ; 7800.12,860 7950,860
NetD4_2: D4.2 J8.1 S.1 U11.6 | length 2067.8
  Bottom Layer w20: J8.1@6975,615 7050,690 S.1@7050,765 7050,1089.76 D4.2@7150,1189.76 7170.24,1210 7600,1210 7650,1260 7650,1410 7700,1460 7700,1920 7750,1970 U11.6@7750,2110
NetD5_1: D5.1 R54.1 | length 100.5
  Bottom Layer w20: R54.1@9300,1309.76 D5.1@9300,1410.24
NetD5_2: D5.2 D6.2 D7.2 U36.12 | length 540.9
  Top Layer w20: D7.2@8900,1689.76 D6.2@9100,1689.76 D5.2@9300,1689.76
  Bottom Layer w20: U36.12@9050,1810 9050,1739.76 D6.2@9100,1689.76
NetD6_1: D6.1 R53.1 | length 100.5
  Bottom Layer w20: R53.1@9100,1309.76 D6.1@9100,1410.24
NetD7_1: D7.1 R55.1 | length 100.5
  Bottom Layer w20: R55.1@8900,1309.76 D7.1@8900,1410.24
NetD8_1: D8.1 R45.2 R46.1 R49.2 | length 1028.7
  Bottom Layer w20: R46.1@4850,710 4850,760 4950,860 4950,1310 5040,1400 R49.2@5040,1410 ; R49.2@5050,1409.76 D8.1@5150,1409.76 ; R49.2@5050,1410 R45.2@5050,1560
NetD8_2: D8.2 D9.1 | length 120.5
  Bottom Layer w20: D9.1@5150,1009.76 D8.2@5150,1130.24
NetD10_1: D10.1 P1.16 U43.2 | length 1477.3
  Bottom Layer w20: D10.1@850,2430.24 P1.16@850,2260 900,2210 900,1860 1300,1460 1300,1210 U43.2@1350,1160
NetD11_1: D11.1 P1.14 U43.3 | length 1477.3
  Bottom Layer w20: D11.1@750,2430.24 P1.14@750,2260 800,2210 800,1810 1250,1360 U43.3@1250,1160
NetD12_1: D12.1 P1.12 U43.26 | length 1818.8
  Bottom Layer w20: D12.1@650,2430.24 P1.12@650,2260 700,2210 700,1810 1100,1410 1100,1010 U43.26@1250,860
NetD13_1: D13.1 P1.10 U43.5 | length 1477.3
  Bottom Layer w20: D13.1@550,2430.24 P1.10@550,2260 600,2210 600,1760 1050,1310 U43.5@1050,1160
NetD14_1: D14.1 P1.8 U43.6 | length 1477.3
  Bottom Layer w20: D14.1@450,2430.24 P1.8@450,2260 500,2210 500,1660 950,1210 U43.6@950,1160
NetD15_1: D15.1 P1.6 U43.11 | length 1311.7
  Bottom Layer w20: D15.1@350,2430.24 P1.6@350,2260 400,2210 400,1260 450,1210 U43.11@450,1160
NetD16_1: D16.1 P1.4 U43.12 | length 1311.7
  Bottom Layer w20: D16.1@250,2430.24 P1.4@250,2260 300,2210 300,1260 350,1210 U43.12@350,1160
NetD17_1: D17.1 P1.2 U43.13 | length 1311.7
  Bottom Layer w20: D17.1@150,2430.24 P1.2@150,2260 200,2210 200,1210 U43.13@250,1160
NetG_1: G.1 R12.2 X8.11 | length 739.8
  Bottom Layer w20: X8.11@7600,170 G.1@7600,765 R12.2@7600,909.76
NetJ1_2: J1.2 U4.15 | length 756.3
  Top Layer w20: U4.15@6950,2410 7000,2360 7250,2360 7350,2260 7590,2260 7600,2270 J1.2@7600,2310
NetJ2_2: J2.2 U4.1 | length 1070.7
  Bottom Layer w20: J2.2@7000,1660 7000,2660 U4.1@7050,2710
NetJ3_2: J3.2 U4.10 | length 730.7
  Bottom Layer w20: U4.10@6450,2410 6500,2360 J3.2@6500,1700
NetJ4_1: J4.1 U14.3 U49.5 | length 776.9
  Bottom Layer w20: J4.1@5450,5204.09 5450,5104.09 5600,4954.09 5600,4660 5650,4610 U14.3@5650,4510
NetJ4_3: J4.3 U49.6 | length 100
  Bottom Layer w20: U49.6@5350,5104.09 J4.3@5350,5204.09
NetJ5_1: J5.1 R63.2 | length 750
  Top Layer w20: J5.1@7250,610 R63.2@8000,610
NetJ5_2: J5.2 X8.16 | length 250.4
  Bottom Layer w20: J5.2@7200,610 7200,395 X8.16@7225,370
NetJ6_1: J6.1 U14.11 U49.2 | length 1306.2
  Top Layer w20: v1(5500,4910) v1(5750,4910)
  Bottom Layer w20: v1(5500,4910) 5500,4660 5600,4560 5600,4310 5550,4260 U14.11@5550,4210 ; v1(5750,4910) J6.1@5750,5204.09
NetJ6_2: J6.2 U39.9 | length 7059
  Top Layer w20: v1(1550,2860) v1(5100,2860) ; v1(5100,5260) 5670,5260 5700,5230 J6.2@5700,5204.09
  Bottom Layer w20: U39.9@1500,2410 1500,2460 1550,2510 v1(1550,2860) ; v1(5100,2860) v1(5100,5260)
NetJ6_3: J6.3 U49.3 | length 100
  Bottom Layer w20: U49.3@5650,5104.09 J6.3@5650,5204.09
NetJ7_1: J7.1 U9.8 U49.9 | length 3398
  Top Layer w20: v1(2750,4860) 5294.09,4860 U49.9@5350,4804.09
  Bottom Layer w20: v1(2750,4860) 2750,4460 2800,4410 U9.8@2800,4210 ; J7.1@5350,4700 U49.9@5350,4804.09
NetJ7_3: J7.3 U49.8 | length 104.1
  Bottom Layer w20: J7.3@5250,4700 U49.8@5250,4804.09
NetJ8_2: J8.2 X8.20 | length 245
  Bottom Layer w20: X8.20@6925,370 J8.2@6925,615
NetJ8_3: J8.3 R13.2 V.1 | length 325.8
  Bottom Layer w20: R13.2@6800,909.76 V.1@6800,765 6800,690 J8.3@6875,615
NetJ11_1: J11.1 U13.3 U34.3 | length 2141.4
  Top Layer w20: v1(4400,3960) 5600,3960 U34.3@5650,3910
  Bottom Layer w20: v1(4400,3960) 4402.47,3957.53 4402.47,3407.53 4450,3360 U13.3@4450,3310 ; U34.3@5650,3910 J11.1@5650,4110
NetJ11_2: J11.2 U32.11 | length 1838.3
  Top Layer w20: J11.2@5600,4110 5600,4140 5620,4160 v1(6150,4160)
  Bottom Layer w20: v1(6150,4160) U32.11@6150,5410
NetJ12_2: J12.2 U29.27 | length 1591.4
  Bottom Layer w20: J12.2@3250,5310 3250,5510 3200,5560 3200,6810 U29.27@3250,6860
NetJ12_3: J12.3 U51.6 | length 541.4
  Top Layer w20: U51.6@2900,5110 2950,5060 v1(3150,5060)
  Bottom Layer w20: v1(3150,5060) 3150,5160 3200,5210 J12.3@3200,5310
NetJ13_2: J13.2 U29.1 | length 150
  Bottom Layer w20: J13.2@2500,6960 U29.1@2650,6960
NetJ13_3: J13.3 R56.2 U1.11 | length 5322.1
  Top Layer w20: v1(2500,2460) 3050,2460 U1.11@3100,2410 U1.11@3100,2420
  Bottom Layer w20: R56.2@2400,6660 2400,6560 2500,6460 ; v1(2500,2460) 2500,6460 ; J13.3@2500,6910 2500,6460
NetJ14_1: J14.1 J15.1 | length 100
  Top Layer w20: J14.1@2900,5310 J15.1@3000,5310
NetJ14_2: J14.2 U14.1 U14.13 U47.6 U53.3 | length 11306.7
  Top Layer w20: U47.6@1700,5110 1750,5060 v1(2600,5060) ; U53.3@2000,3910 2050,3860 v1(2600,3860) ; v1(2600,2160) v1(6100,2160) ; v1(2600,5210) 2820,5210 2850,5240 J14.2@2850,5310 ; v1(5750,4410) U14.1@5850,4510 5950,4410 v1(6100,4410)
  Bottom Layer w20: v1(2600,2160) v1(2600,3860) v1(2600,5060) v1(2600,5210) ; U14.13@5750,4210 v1(5750,4410) ; v1(6100,2160) v1(6100,4410)
NetJ14_3: J14.3 U51.8 | length 541.4
  Bottom Layer w20: U51.8@2800,4810 2800,4910 2750,4960 2750,5260 J14.3@2800,5310
NetJ15_2: J15.2 U20.20 | length 1082.8
  Top Layer w20: J15.2@3050,5310 3050,5260 3100,5210 3660,5210 3810,5060 U20.20@4000,5060
NetJ15_3: J15.3 U51.9 | length 582.8
  Bottom Layer w20: U51.9@2900,4810 2900,4910 3050,5060 3050,5210 3100,5260 J15.3@3100,5310
NetJ16_2: J16.2 U17.13 | length 9232.8
  Top Layer w20: v1(1650,4051.62) 1656.06,4057.69 8582.31,4057.69 8630,4010 9100,4010 v1(9150,4060)
  Bottom Layer w20: J16.2@1550,5550 1550,4151.62 v1(1650,4051.62) ; v1(9150,4060) U17.13@9150,4210
NetJ16_3: J16.3 U45.10 | length 110
  Bottom Layer w20: J16.3@1600,5550 U45.10@1600,5660
NetJ17_2: J17.2 U16.10 | length 5299.9
  Top Layer w20: v1(1950,7010) 2045.56,7105.56 5354.44,7105.56 5450,7010 v1(6400,7010)
  Bottom Layer w20: J17.2@1950,6660 v1(1950,7010) ; v1(6400,7010) 6400,6660 U16.10@6450,6610
NetJ17_3: J17.3 U46.4 | length 100
  Bottom Layer w20: U46.4@1900,6560 J17.3@1900,6660
NetJ18_2: J18.2 U16.13 | length 6536.7
  Top Layer w20: v1(1550,7010) 1690,7150 5410,7150 5500,7060 6650,7060 v1(6700,7010)
  Bottom Layer w20: J18.2@1550,6160 v1(1550,7010) ; v1(6700,7010) 6700,6660 U16.13@6750,6610
NetJ18_3: J18.3 U46.9 | length 100
  Bottom Layer w20: J18.3@1500,6160 U46.9@1500,6260
NetJ19_2: J19.2 U21.1 | length 711.4
  Top Layer w20: U21.1@8270,5110 U21.1@8250,5110 8300,5160 v1(8550,5160)
  Bottom Layer w20: v1(8550,5160) 8600,5110 J19.2@8600,4810
NetJ20_2: J20.2 U22.1 | length 601.4
  Top Layer w20: U22.1@9460,5110 U22.1@9450,5110 9500,5160 v1(9650,5160)
  Bottom Layer w20: v1(9650,5160) 9700,5110 J20.2@9700,4810
NetJ21_2: J21.2 U23.1 | length 711.4
  Top Layer w20: U23.1@8270,5710 U23.1@8250,5710 8300,5760 v1(8550,5760)
  Bottom Layer w20: v1(8550,5760) 8600,5710 J21.2@8600,5410
NetJ22_2: J22.2 U24.1 | length 601.4
  Top Layer w20: U24.1@9460,5710 U24.1@9450,5710 9500,5760 v1(9650,5760)
  Bottom Layer w20: v1(9650,5760) 9700,5710 J22.2@9700,5410
NetJ23_2: J23.2 U25.1 | length 572.1
  Top Layer w20: U25.1@8260,6310 U25.1@8250,6310 8350,6210 v1(8550,6210)
  Bottom Layer w20: v1(8550,6210) 8600,6160 J23.2@8600,6010
NetJ24_2: J24.2 U26.1 | length 591.4
  Top Layer w20: U26.1@9450,6310 9500,6360 v1(9650,6360)
  Bottom Layer w20: v1(9650,6360) 9700,6310 J24.2@9700,6010
NetJ25_2: J25.2 U27.1 | length 691.4
  Top Layer w20: U27.1@8250,6910 8300,6960 v1(8550,6960)
  Bottom Layer w20: v1(8550,6960) 8600,6910 J25.2@8600,6610